# Altium PCB oraganator.PcbDoc
Units mil, origin at the board's own origin, x right, y up, seen from the top; angles counter-clockwise.
Board outline 10845 x 5000 mil, 2 copper layers (Top Layer, Bottom Layer); 47 components, 23 nets, 108 pads, 0 vias.
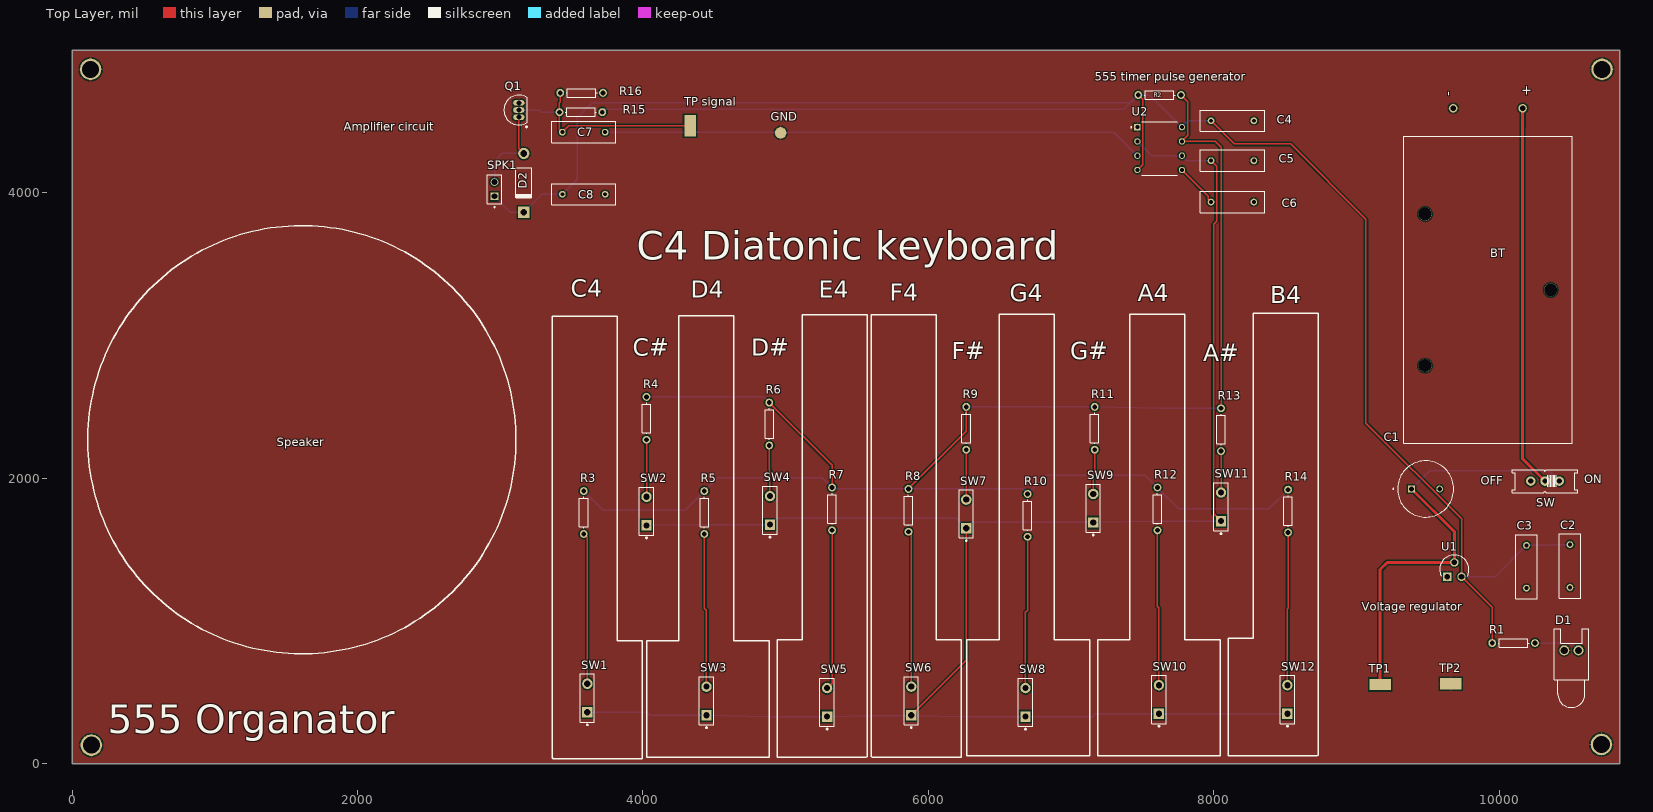
[diagram p0: Top Layer view]
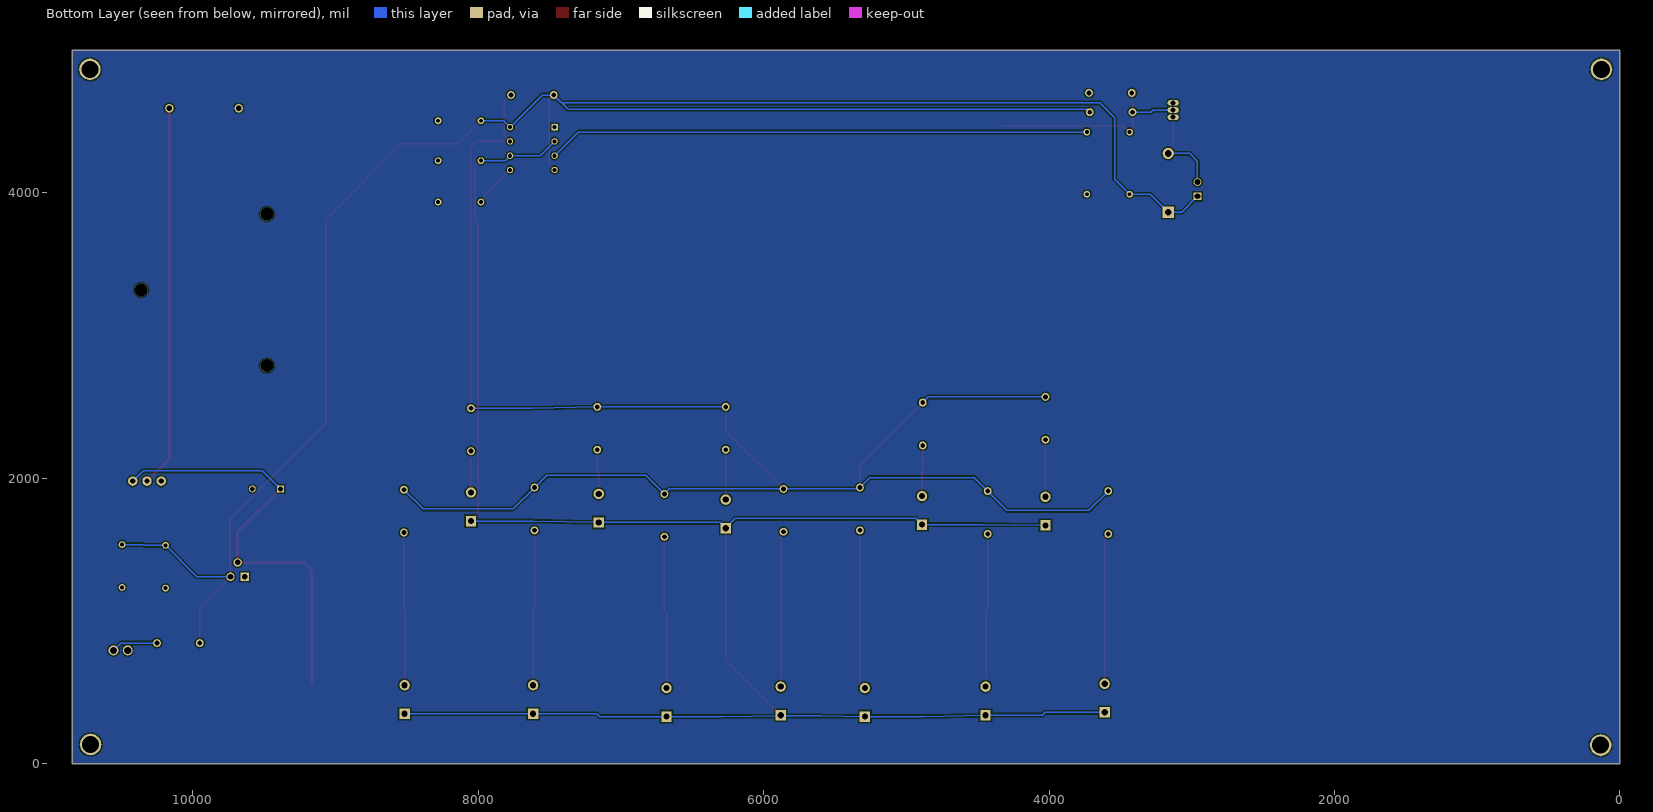
[diagram p1: Bottom Layer view, seen from below]

## Layer stack, top to bottom
Top Solder: solder mask 0.4, Solder Resist, Dk 3.5
Top Layer: signal copper 1.4
Dielectric 1: dielectric 12.6, FR-4, Dk 4.8
Bottom Layer: signal copper 1.4
Bottom Solder: solder mask 0.4, Solder Resist, Dk 3.5

## Board outline
0,0 10845,0 10845,5000 0,5000

## Design rules (kind name [scope] priority, off if disabled: settings)
Clearance [All] p1: gap=10 ignorepadtopadclearanceinfootprint=FALSE except(0: Arc-Hole Track-Hole SMDPad-Hole THPad-Hole Via-Hole Fill-Hole Poly-Hole Region-Hole Text-Hole)
PolygonConnect [All] p1: connectstyle=Relief reliefconductorwidth=10 reliefentries=4 polygonreliefangle="90 Angle" airgapwidth=10
RoutingVias [All] p1: holewidth=28 width=50 viastyle="Through Hole" minholewidth=28 minwidth=50 maxholewidth=28 maxwidth=50
SolderMaskExpansion [All] p1: expansion=4
Width [All] p1: maxlimit=10 minlimit=10 preferedwidth=10
30 further rules are at their usual default settings.

## Classes and differential pairs
net class VCC: VCC

## Components (designator, comment, footprint, x,y, rotation, side; value= is the part's Value field where it differs from the comment)
BT "BH9VL" BAT_BH9VL 9920,3320 r90 top
C1 "20~100uF" CAPPRD500W60D1000H2000 9483.43,1925 r0 top
C2 "Cap" RAD-0.3 10495,1385 r90 top value=10uF
C3 "Cap" RAD-0.3 10190,1380 r90 top value=0.01uF
C4 "Cap" RAD-0.3 8130,4505 r180 top value=100pF
C5 "Cap" RAD-0.3 8130,4225 r180 top value=100pF
C6 "Cap" RAD-0.3 8130,3935 r180 top value=100pF
C7 "Cap" RAD-0.3 3585,4425 r0 top value=100uF
C8 "Cap" RAD-0.3 3585,3990 r0 top value=100pF
D1 "LED0" LED-0 10505,793.94 r0 top
D2 "Diode 1N4001" DO-41 3165,4070 r270 top
Q1 "NPN" TO-226-AA 3130,4580 r0 top
R1 "Res1" AXIAL-0.3 10100,845 r0 top value=1K
R2 "Res1" AXIAL-0.3 7620,4685 r180 top value=1K
R3 "Res1" AXIAL-0.3 3585,1760 r90 top value=1K
R4 "Res1" AXIAL-0.3 4025,2420 r90 top value=1K
R5 "Res1" AXIAL-0.3 4430,1760 r90 top value=1K
R6 "Res1" AXIAL-0.3 4885,2380 r90 top value=1K
R7 "Res1" AXIAL-0.3 5325,1785 r90 top value=1K
R8 "Res1" AXIAL-0.3 5860,1775 r90 top value=1K
R9 "Res1" AXIAL-0.3 6265,2350 r90 top value=1K
R10 "Res1" AXIAL-0.3 6695,1740 r90 top value=1K
R11 "Res1" AXIAL-0.3 7165,2350 r90 top value=1K
R12 "Res1" AXIAL-0.3 7605,1785 r90 top value=1K
R13 "Res1" AXIAL-0.3 8050,2340 r90 top value=1K
R14 "Res1" AXIAL-0.3 8520,1770 r90 top value=1K
R15 "Res" AXIAL-0.3 3565,4565 r0 top value=1K
R16 "Res1" AXIAL-0.3 3570,4700 r180 top value=1K
SPK1 "TSW-102-26-L-S" SAMTEC_TSW-102-26-L-S 2960,3975 r90 top
SW "EG1218" EG1218 10320,1980 r180 top (schematic designator S)
SW1 "SW-SPST" SPST-2 3610,460 r90 top
SW2 "SW-SPST" SPST-2 4025,1770 r90 top
SW3 "SW-SPST" SPST-2 4445,440 r90 top
SW4 "SW-SPST" SPST-2 4890,1775 r90 top
SW5 "SW-SPST" SPST-2 5290,430 r90 top
SW6 "SW-SPST" SPST-2 5880,440 r90 top
SW7 "SW-SPST" SPST-2 6265,1750 r90 top
SW8 "SW-SPST" SPST-2 6680,430 r90 top
SW9 "SW-SPST" SPST-2 7155,1790 r90 top
SW10 "SW-SPST" SPST-2 7615,450 r90 top
SW11 "SW-SPST" SPST-2 8050,1800 r90 top
SW12 "SW-SPST" SPST-2 8515,450 r90 top
TP1 "5019" TP380X203 9165,555 r0 top
TP2 "5019" TP380X203 9660,560 r0 top
"TP signal" "5019" TP380X203 4330,4470 r90 top
U1 "MCP1702-5002E/TO" TO127P254X533-3 9735,1410 r0 top
U2 "LMC555CN/NOPB" DIP794W45P254L959H508Q8 7620,4310 r0 top

## Footprints (in the part's own frame and the unit in brackets; to place one, negate y for a bottom-side part, rotate by r counter-clockwise, add the part's x,y. Pads: shape width x height; smd on the part's side, far side on the other; paste and mask are expansions set on the pad)
AXIAL-0.3 [mm] "Axial Device, Thru-Hole; 2 Leads; 0.3 in Pin Spacing"
  round 1.4 hole 0.85: 1(-3.81,0) 2(3.81,0)
  silkscreen extent -2.77,-0.76 2.77,0.76
BAT_BH9VL [mm]
  round 1.508 hole 1: NEG(32.305,6.175) POS(32.305,-6.175)
  round 2.29 hole 2.29 unplated: ""(-13.495,11.175) ""(-0.005,-11.175) ""(13.475,11.175)
  silkscreen extent -27.3,-14.98 27.3,14.98
CAPPRD500W60D1000H2000 [mm]
  round 1.2 hole 0.85: N(2.5,0)
  rect 1.2x1.2 hole 0.85: P(-2.5,0)
  silkscreen extent -5.85,-5 5,5, body extent -5,-5 5,5, height 20
DIP794W45P254L959H508Q8 [mm]
  rect 1.13x1.13 hole 0.74: 1(-3.97,3.81)
  round 1.13 hole 0.74: 2(-3.97,1.27) 3(-3.97,-1.27) 4(-3.97,-3.81) 5(3.97,-3.81) 6(3.97,-1.27) 7(3.97,1.27) 8(3.97,3.81)
  silkscreen extent -5.13,-4.8 3.17,4.8
DO-41 [mm] "Diode, Axial; Body 5.2 x 2.7 mm (LxDia. max), Lead Dia. 0.86 mm (max)"
  round 2 hole 1.2: 1(-5.23,0)
  rect 2x2 hole 1.2: 2(5.23,0)
  silkscreen extent -2.65,-1.4 2.75,1.4
EG1218 [mil]
  round 66 hole 35.43: O(-100,0) P(0,0) S(100,0)
  silkscreen extent -230,-80 230,80
LED-0 [mil] "LED; 2 Leads"
  round 70 hole 50: 1(50,0) 2(-50,0)
  silkscreen extent -120,-400 120,150
RAD-0.3 [mm] "Radial Cap, Thru-Hole; 2 Leads; 0.3 in Pin Spacing"
  round 1.2 hole 0.7: 1(-3.81,0) 2(3.81,0)
  silkscreen extent -5.71,-1.91 5.71,1.91
SAMTEC_TSW-102-26-L-S [mm]
  rect 1.37x1.37 hole 1.02: 01(0,0)
  round 1.37 hole 1.02: 02(2.54,0)
  silkscreen extent -2.02,-1.27 3.81,1.27
SPST-2 [mm] "Switch; 2 Leads"
  rect 1.85x1.85 hole 1.1: 1(-2.54,0)
  round 1.85 hole 1.1: 2(2.54,0)
  silkscreen extent -4.89,-1.27 4.28,1.27
TO127P254X533-3 [mil]
  rect 59x59 hole 39: 1(-100,-100)
  round 59 hole 39: 2(-50,0) 3(0,-100)
  silkscreen extent -153,-95 52,52
TO-226-AA [mm] "TO, Flat Index; 3 In-Line, Axial Leads; Body Dia. 4.8mm; Leads 0.55 x 0.51 mm (max)"
  oval 2x1 hole 0.9: 1(0,-1.27) 2(0,0) 3(0,1.27)
  silkscreen extent -2.65,-3.13 1.52,2.65, body extent -2.65,-2.66 1.52,2.66, height 5.33
TP380X203 [mm]
  rect 3.8x2.03 smd: 1(0,0)

## Part data
BT: "Battery Holder _Open_ 9V 1 Cell Solder Lug", Package=None, Availability=Unavailable, MF=MPD, MP=BH9VL, Price=None, SnapEDA_Link=https://www.snapeda.com/parts/BH9VL/MPD/view-part/4480504/?ref=snap
C1: library part EEUFC1C821B, "820F 16V Aluminum Electrolytic Capacitors Radial, Can 3000 Hrs @ 105C", Package="RADIAL-2 Panasonic", Availability="In Stock", Check_prices=https://www.snapeda.com/parts/EEU-FC1C821B/Panasonic/view-part/?ref=eda, MF=Panasonic, MP=EEU-FC1C821B, Price=None, Purchase-URL=https://pricing.snapeda.com/search/part/EEU-FC1C821B/?ref=eda, SnapEDA_Link=https://www.snapeda.com/parts/EEU-FC1C821B/Panasonic/view-part/?ref=snap
C2 C3 C4 C5 C6 C7 C8: "Capacitor", LatestRevisionDate=17-Jul-2002, LatestRevisionNote="Re-released for DXP Platform.", PackageDescription="Radial Cap, Thru-Hole; 2 Leads; 0.3 in Pin Spacing", PackageReference=RAD-0.3, Published=8-Jun-2000, Publisher="Altium Limited"
D1: "Typical INFRARED GaAs LED", LatestRevisionDate=08-Jul-2005, LatestRevisionNote="Mech Layer 1 removed.", PackageDescription="LED; 2 Leads", PackageReference=LED-0, Published=8-Jun-2000, Publisher="Altium Limited"
D2: "1 Amp General Purpose Rectifier", Code_JEDEC=DO-204-AL, ComponentLink1Description="Manufacturer Link", ComponentLink1URL=http://www.fairchildsemi.com/, ComponentLink2Description=Datasheet, ComponentLink2URL=http://www.fairchildsemi.com/ds/1N%2F1N4001.pdf, DatasheetVersion=1998, LatestRevisionDate=17-Jul-2002, LatestRevisionNote="Re-released for DXP Platform.", PackageDescription="Diode, Axial; Body 5.2 x 2.7 mm (LxDia. max), Lead Dia. 0.86 mm (max)", PackageReference=DO-41, PackageVersion=Aug-1999, Published=8-Jun-2000, Publisher="Altium Limited"
Q1: "NPN Bipolar Transistor", Code_JEDEC=TO-226-AA, LatestRevisionDate=17-Jul-2002, LatestRevisionNote="Re-released for DXP Platform.", PackageDescription="TO, Flat Index; 3 In-Line, Axial Leads; Body Dia. 4.8mm; Leads 0.55 x 0.51 mm (max)", PackageReference=TO-226-AA, Published=8-Jun-2000, Publisher="Altium Limited"
R1 R2 R3 R4 R5 R6 R7 R8 R9 R10 R11 R12 R13 R14 R16: "Resistor", LatestRevisionDate=17-Jul-2002, LatestRevisionNote="Re-released for DXP Platform.", PackageDescription="Axial Device, Thru-Hole; 2 Leads; 0.3 in Pin Spacing", PackageReference=AXIAL-0.3, Published=8-Jun-2000, Publisher="Altium Limited"
R15: library part Res1, "Resistor", LatestRevisionDate=17-Jul-2002, LatestRevisionNote="Re-released for DXP Platform.", PackageDescription="Axial Device, Thru-Hole; 2 Leads; 0.3 in Pin Spacing", PackageReference=AXIAL-0.3, Published=8-Jun-2000, Publisher="Altium Limited"
SPK1 U2: Package=None, Availability=Unavailable, Price=None
  SPK1: MP=TSW-102-26-L-S
  U2: MP=LMC555CN/NOPB
SW: "滑動開關SPDT通孔", Package="Custom package E-Switch", Availability=Unavailable, MF=E-Switch, MP=EG1218, Price=None, SnapEDA_Link=https://www.snapeda.com/parts/EG1218/E-Switch/view-part/13895/?ref=snap
SW1 SW2 SW3 SW4 SW5 SW6 SW7 SW8 SW9 SW10 SW11 SW12: "Single-Pole, Single-Throw Switch", LatestRevisionDate=17-Jul-2002, LatestRevisionNote="Re-released for DXP Platform.", PackageDescription="Switch; 2 Leads", PackageReference=SPST-2, Published=24-Mar-1999, Publisher="Altium Limited"
TP1 TP2 "TP signal": "PC Test Point, Miniature Phosphor Bronze, Silver Plating Surface Mount Mounting Type", Package="2010 Keystone", Digi-Key_Part_Number=36-5019CT-ND, Digi-Key_Purchase_URL=https://www.digikey.com/product-detail/en/keystone-electronics/5019/36-5019CT-ND/3907344?utm_source=snapeda&utm_medium=aggregator&utm_campaign=symbol, MF="Keystone Electronics", MP=5019, SnapEDA_Link=https://www.snapeda.com/parts/5019/Keystone%20Electronics/view-part/449144/?ref=snap
U1: "Linear Voltage Regulator IC 1 Output 250mA TO-92-3", Package="TO-92 Microchip", Availability=Unavailable, MF=Microchip, MP=MCP1702-5002E/TO, Price=None, SnapEDA_Link=https://www.snapeda.com/parts/MCP1702-5002E/TO/Microchip/view-part/263943/?ref=snap

## Free pads (board coordinates)
  round 150 hole 120: 1(130,4865) 1(135,130) 1(10715,135) 1(10720,4865)
  round 80 smd: 2(4965,4420)

## Nets (pads, with @x,y where several pads share a name; then routed paths per layer and width w, separated by ;. In a path a pad name is that pad's centre, name@x,y a point inside that pad or via, vN(x,y) a via of type N, cw(c..) or ccw(c..) an arc to the next point about the centre after c; other vN are vias at no path point)
GND: BT.NEG C1.N C2.1 C3.1 C4.1 C5.1 C6.1 C8.2 D1.2 pad.1 pad.2 Q1.3 R16.1 TP2.1 U1.1 U2.1
NetC5_2: C5.2 SW1.1 SW2.1 SW3.1 SW4.1 SW5.1 SW6.1 SW7.1 SW8.1 SW9.1 SW10.1 SW11.1 SW12.1 U2.2 U2.6 | length 13622.5
  Top Layer w10: SW6.1 6265,725 SW7.1 ; C5.2 8019,4186 8019,3801 7998,3780 7998,1752 SW11.1
  Bottom Layer w10: SW1.1 4028,360 4048,340 SW3.1 4878,330 SW5.1 5595,335 5880,335 6290,330 SW8.1 7148,330 7168,350 SW10.1 SW12.1 ; SW2.1 4463,1675 SW4.1 4933,1718 6197,1718 SW7.1 6305,1690 SW9.1 7613,1700 SW11.1 ; U2.2 7563.7,4260 U2.6 7811.3,4225 C5.2
NetC6_2: C6.2 U2.5 | length 309.4
  Top Layer w10: U2.5 7960,3976.3 7960,3955 C6.2
NetC7_1: "TP signal.1" C7.1 Q1.2 R15.1 R16.2 | length 1490.2
  Top Layer w10: R16.2 3420,4635 3415,4630 R15.1 3415,4445 C7.1 3480,4470 4330,4470
  Bottom Layer w10: Q1.2 3272,4580 3287,4565 R15.1
NetC7_2: C7.2 U2.3 | length 3797
  Bottom Layer w10: C7.2 7298.7,4425 U2.3
NetD1_1: D1.1 R1.2 | length 326.2
  Bottom Layer w10: R1.2 10503.94,845 D1.1
NetD2_1: D2.1 Q1.1 SPK1.02 | length 642.3
  Top Layer w10: Q1.1 3130,4310.91 D2.1
  Bottom Layer w10: SPK1.02 2960,4220.91 3015,4275.91 D2.1
NetR2_1: R2.1 R3.2 R4.2 R5.2 R6.2 R7.2 R8.2 R9.2 R10.2 R11.2 R12.2 R13.2 R14.2 U2.7 | length 12005.3
  Top Layer w10: R6.2 5325,2090 R7.2 ; R8.2 6265,2330 R9.2 ; R2.1 7818,4637 7818,4401.7 U2.7 8010,4360 8050,4320 R13.2
  Bottom Layer w10: R3.2 3720,1775 4295,1775 R5.2 4525,2005 5255,2005 R7.2 5334.31,1925 R8.2 6660,1925 R10.2 6825,2020 7520,2020 R12.2 7755,1785 8385,1785 R14.2 ; R4.2 4845,2570 R6.2 ; R9.2 R11.2 7618,2490 R13.2
NetR3_1: R3.1 SW1.2 | length 1060.4
  Top Layer w10: R3.1 3610,1585 SW1.2
NetR4_1: R4.1 SW2.2 | length 400
  Top Layer w10: SW2.2 R4.1
NetR5_1: R5.1 SW3.2 | length 1076.2
  Top Layer w10: R5.1 4430,1090 4445,1075 SW3.2
NetR6_1: R6.1 SW4.2 | length 357.1
  Top Layer w10: R6.1 4885,2058 4890,2053 SW4.2
NetR7_1: R7.1 SW5.2 | length 1119.5
  Top Layer w10: SW5.2 5325,565 R7.1
NetR8_1: R8.1 SW6.2 | length 1093.3
  Top Layer w10: R8.1 5880,1605 SW6.2
NetR9_1: R9.1 SW7.2 | length 350
  Top Layer w10: SW7.2 R9.1
NetR10_1: R10.1 SW8.2 | length 1066.2
  Top Layer w10: SW8.2 6680,1060 6695,1075 R10.1
NetR11_1: R11.1 SW9.2 | length 314.1
  Top Layer w10: SW9.2 7155,2040 7165,2050 R11.1
NetR12_1: R12.1 SW10.2 | length 1089.1
  Top Layer w10: R12.1 7605,1103 7615,1093 SW10.2
NetR13_1: R13.1 SW11.2 | length 290
  Top Layer w10: SW11.2 R13.1
NetR14_1: R14.1 SW12.2 | length 1072.1
  Top Layer w10: SW12.2 8515,1085 8520,1090 R14.1
VBATT: BT.POS SW.P | length 2676.9
  Top Layer w10: 10163,4455.89 10163.11,4456
  Top Layer w20: 10163,4455.89 10163,2137 SW.P ; 10163.11,4456 BT.POS
VBATT_SW: C1.P SW.O TP1.1 U1.2 | length 3102.4
  Top Layer w20: TP1.1 9165,1360 9215,1410 U1.2 9685,1625 C1.P
  Bottom Layer w10: C1.P 9512,2052 10348,2052 SW.O
VCC: C2.2 C3.2 C4.2 C8.1 D2.2 R1.1 R2.2 R15.2 SPK1.01 U1.3 U2.4 U2.8 | length 15688.9
  Top Layer w10: U2.4 7501,4197.3 7501,4654 R2.2 ; C4.2 8142,4343 8538,4343 9065,3816 9065,2385 9735,1715 U1.3 9950,1095 R1.1
  Bottom Layer w10: SPK1.01 3070.91,3864.09 D2.2 3290.91,3990 C8.1 3540,4095 3540,4525 3645,4630 7415,4630 R2.2 ; R15.2 3735,4585 7370,4585 R2.2 ; C4.2 7821.3,4505 U2.8 7551.3,4685 R2.2 ; U1.3 9970,1310 C3.2 10340,1530 10345,1535 C2.2
pads on no net: BT. SW.S

## Polygon pours and split planes (outlines as drawn)
GND on Top Layer "Top Layer-GND" (solid, pour order 0): 0,0 10845,0 10845,5000 0,5000
GND on Bottom Layer "Bottom Layer-GND" (solid, pour order 1): 0,0 10845,0 10845,5000 0,5000

## Silkscreen, mask and mechanical layers (free items; w line width, h text height)
Top Overlay:
  circle w10: c1610,2270 r1500
  lines w10: 3365,40 3370,35 3995,35 3995,860 3820,860 3820,3135 3365,3135 3365,40 ; 4025,45 4885,45 4885,860 4635,860 4635,3140 4250,3140 4250,860 4025,860 4025,45 ; 4940,45 5565,45 5570,50 5570,3145 5115,3145 5115,870 4940,870 4940,45 ; 5600,50 5600,3145 6055,3145 6055,870 6230,870 6230,45 5605,45 5600,50 ; 6270,55 7130,55 7130,870 6880,870 6880,3150 6495,3150 6495,870 6270,870 6270,55 ; 7185,55 7185,870 7410,870 7410,3150 7795,3150 7795,870 8045,870 8045,55 7185,55 ; 8100,55 8100,880 8275,880 8275,3155 8730,3155 8730,60 8725,55 8100,55
  text "555 timer pulse generator" at 7165,4785 h60
  text "GND" at 4895,4505 h60
  text "Amplifier circuit" at 1905,4435 h60
  text "C4 Diatonic keyboard" at 3955,3530 h200
  text "C4" at 3495,3270 h120
  text "D4" at 4335,3265 h120
  text "E4" at 5230,3265 h120
  text "F4" at 5730,3245 h120
  text "G4" at 6570,3240 h120
  text "A4" at 7465,3240 h120
  text "B4" at 8395,3225 h120
  text "C#" at 3930,2860 h120
  text "D#" at 4760,2860 h120
  text "F#" at 6165,2835 h120
  text "G#" at 6995,2835 h120
  text "A#" at 7925,2820 h120
  text "Speaker" at 1435,2225 h60
  text "ON" at 10595,1965 h60
  text "OFF" at 9870,1955 h60
  text "Voltage regulator" at 9035,1070 h60
  text "555 Organator" at 250,215 h200

## Text inside footprints (layer, text, board x,y; h text height)
BT: Top Overlay "-" at 9670,4675.12 h70 r90; Top Overlay "+" at 10220,4675.12 h70 r90; Mechanical 13 "-" at 9670,4675.12 h70 r90; Mechanical 13 "+" at 10220,4675.12 h70 r90